# Altium PCB nrf5340_qkaa_config3.PcbDoc
Units mm, origin at the board's own origin, x right, y up, seen from the top; angles counter-clockwise.
Board outline 17 x 15 mm, 4 copper layers (Top Layer, Mid Layer 1, Mid Layer 2, Bottom Layer), stack 1.583 mm thick; 23 components, 63 nets, 192 pads, 114 vias.
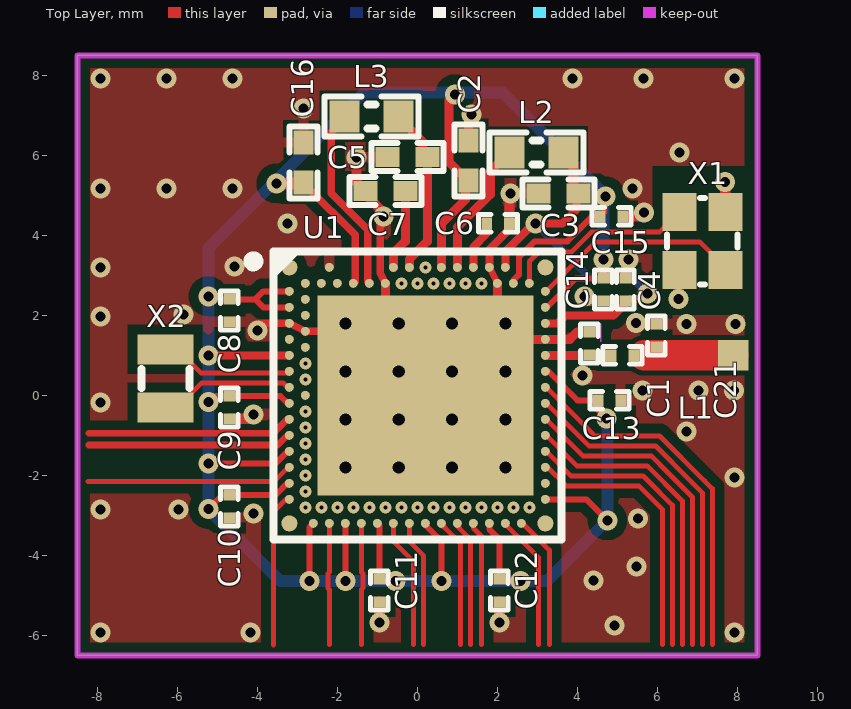
[diagram p0: Top Layer view]
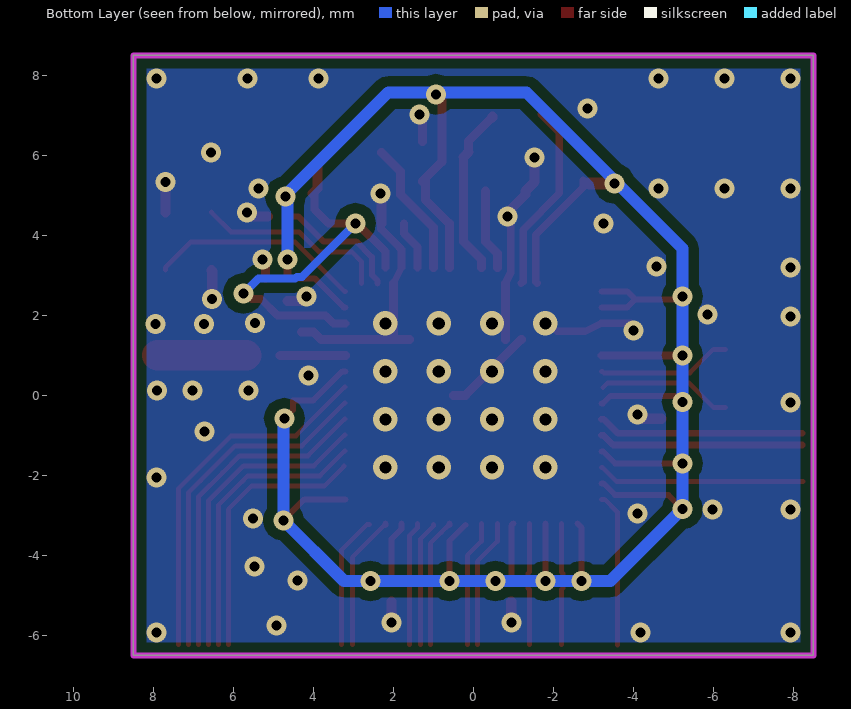
[diagram p1: Bottom Layer view, seen from below]
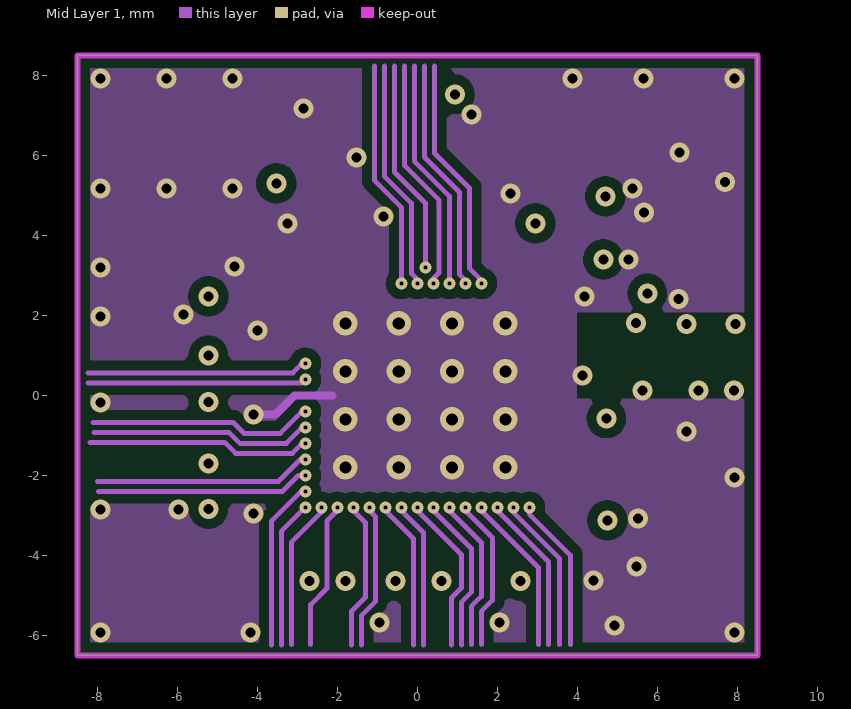
[diagram p2: Mid Layer 1]
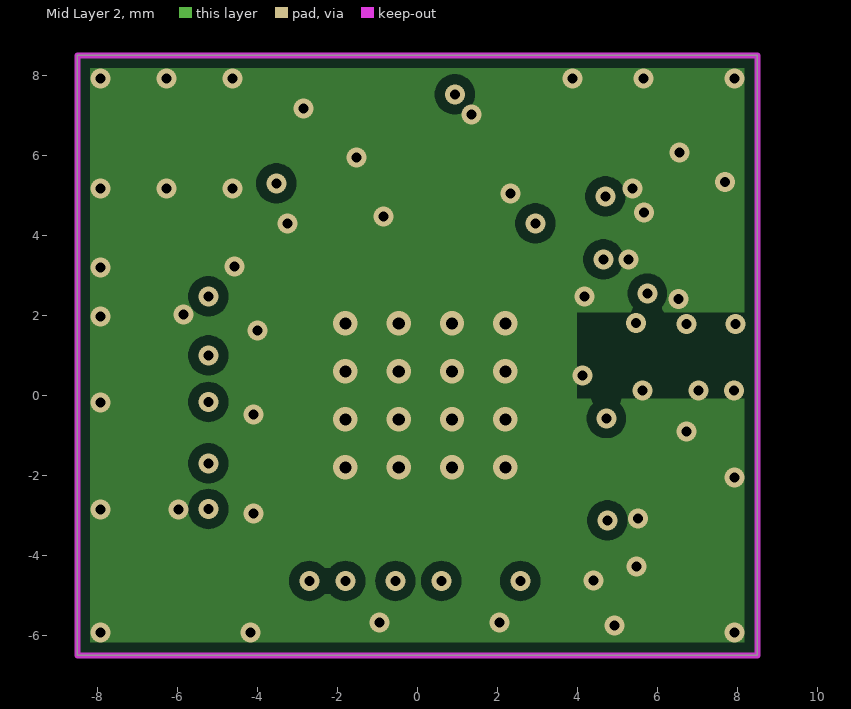
[diagram p3: Mid Layer 2]
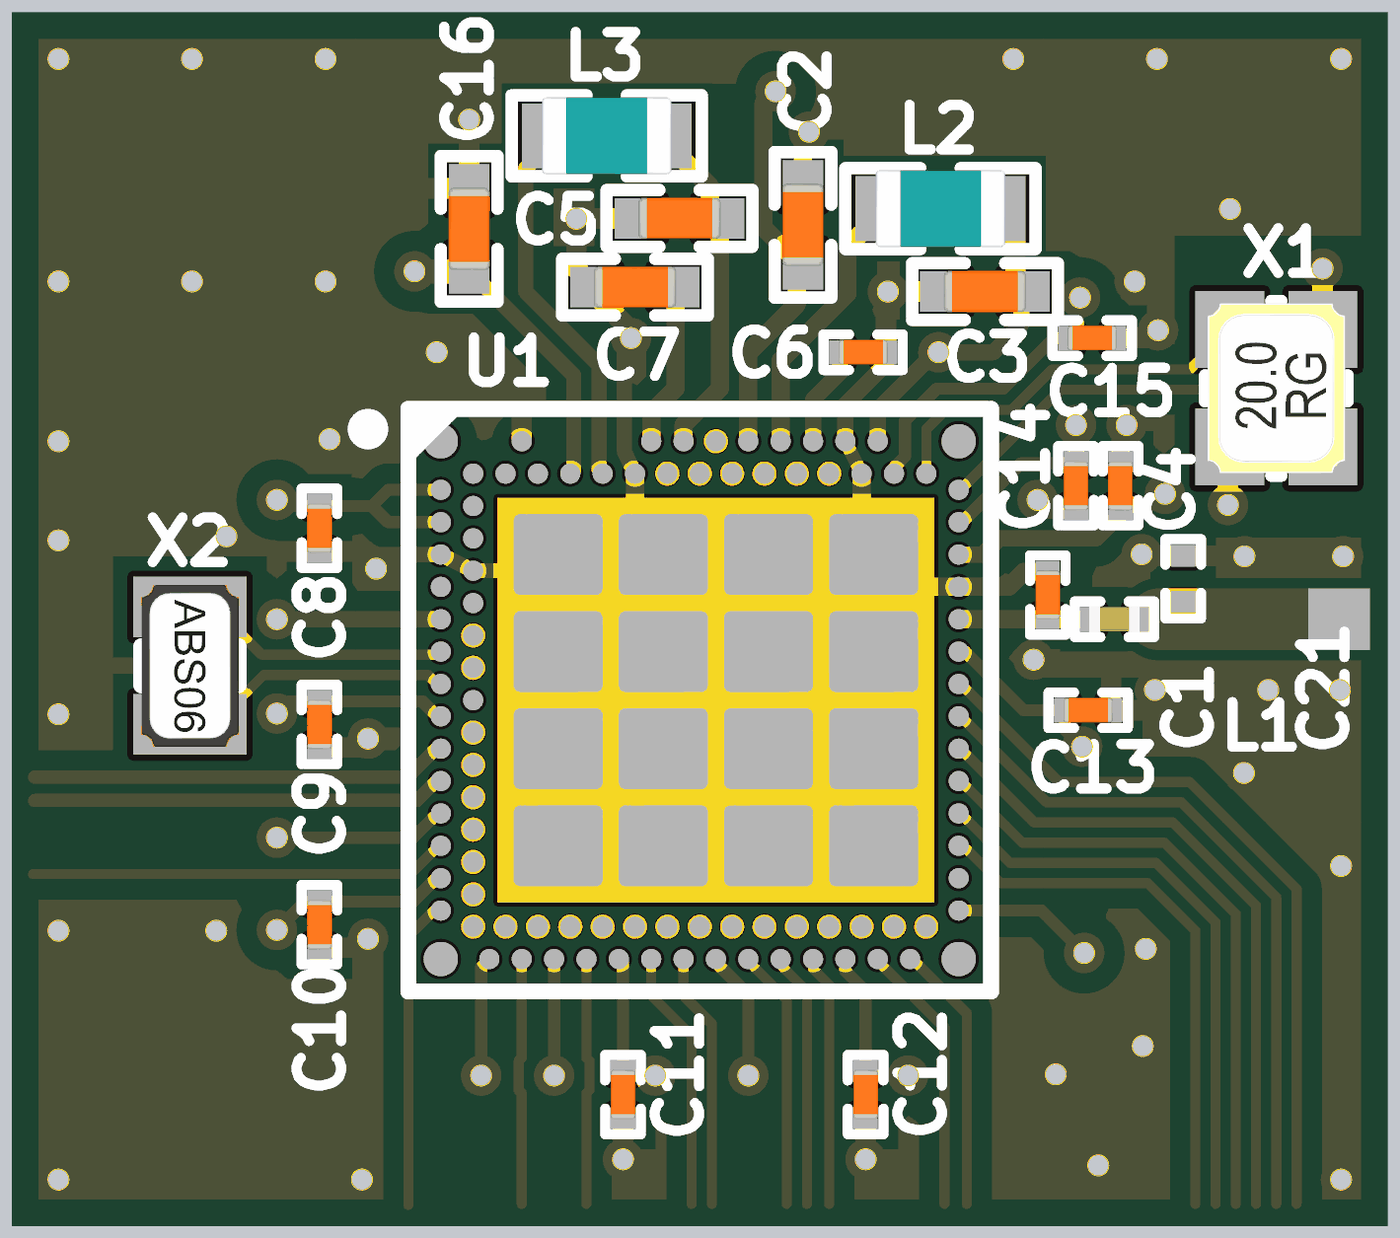
[diagram p4: 3D render of the assembled board from above, using the file's embedded part models]

## Layer stack, top to bottom
Top Solder: solder mask 0.0102, Solder Resist, Dk 3.5
Top Layer: signal copper 0.0356
Dielectric1: core 0.07, FR-4, Dk 4.8
Mid Layer 1: signal copper 0.036
Dielectric 3: prepreg 1.3, Dk 4.2
Mid Layer 2: signal copper 0.036
Dielectric 2: core 0.07, Dk 4.2
Bottom Layer: signal copper 0.0356
Bottom Solder: solder mask 0.0102, Solder Resist, Dk 3.5

## Board outline
-8.5,-6.5 8.5,-6.5 8.5,8.5 -8.5,8.5

## Design rules (kind name [scope] priority, off if disabled: settings)
Clearance Clearance_microvia [AsMM(ViaDiameter) = 0.3 vs AsMM(ViaDiameter) = 0.3] p1: gap=0.1 ignorepadtopadclearanceinfootprint=FALSE
Clearance Polygon_ANT [(InNamedPolygon('Top_Layer-GND')) or  (InNamedPolygon('Mid_Layer_1-GND')) or (InNamedPolygon('Mid_Layer_2-GND')) or (InNamedPolygon('Bottom_Layer-GND')) vs InNet('RF')] p2: gap=0.127 ignorepadtopadclearanceinfootprint=FALSE except(0: Arc-Hole Track-Hole SMDPad-Hole THPad-Hole Via-Hole Fill-Hole Poly-Hole Region-Hole Text-Hole)
Clearance Polygon [(InNamedPolygon('Top_Layer-GND')) or  (InNamedPolygon('Mid_Layer_1-GND')) or (InNamedPolygon('Mid_Layer_2-GND')) or (InNamedPolygon('Bottom_Layer-GND'))] p3: gap=0.25 ignorepadtopadclearanceinfootprint=FALSE
Clearance Clearance_Top [OnTopLayer] p4: gap=0.125 ignorepadtopadclearanceinfootprint=FALSE
Clearance [All] p5: gap=0.125 ignorepadtopadclearanceinfootprint=FALSE
ComponentClearance [All] p1 off: gap=0.254 collisioncheckmode=3 verticalgap=0.254 showdistances=FALSE
DiffPairsRouting [All] p1: maxlimit=0.193 minlimit=0.193 mostfreqgap=0.193 toplayer_minwidth=0.125 toplayer_maxwidth=0.381 toplayer_prefwidth=0.165 midlayer1_minwidth=0.125 midlayer1_maxwidth=0.381 midlayer1_prefwidth=0.165 midlayer2_minwidth=0.125 midlayer2_maxwidth=0.381 midlayer2_prefwidth=0.165 bottomlayer_minwidth=0.125 bottomlayer_maxwidth=0.381 bottomlayer_prefwidth=0.165 maxuncoupledlength=12.7
FabricationTestPointUsage TestPointUsage [All] p1: valid=0 allowmultiple=FALSE
FabricationTestpoint Testpoint [All] p1: side=3 testpointundercomponent=TRUE minsize=1.016 maxsize=2.54 preferedsize=1.524 minholesize=0 maxholesize=1.016 preferedholesize=0.813 testpointgrid=0.025 allowsidetop=TRUE allowsidebottom=TRUE usegrid=TRUE gridtolerance=0
Height [All] p1 off: minheight=0 maxheight=25.4 prefheight=12.7
HoleSize [All] p1: absolutevalues=TRUE maxlimit=4.064 minlimit=0.1 maxpercent=80.000 minpercent=20.000
MinimumAnnularRing [All] p1 off: minimumring=0.152
PolygonConnect PolygonConnect_1 [isVia and innet(gnd)] p1: connectstyle=Direct reliefconductorwidth=0.254 reliefentries=4 polygonreliefangle="90 Angle" airgapwidth=0.254
PolygonConnect [All] p2: connectstyle=Relief reliefconductorwidth=0.254 reliefentries=4 polygonreliefangle="90 Angle" airgapwidth=0.254
RoutingVias [All] p1: holewidth=0.305 width=0.61 viastyle="Through Hole" minholewidth=0.1 minwidth=0.3 maxholewidth=0.305 maxwidth=0.61
SilkToSolderMaskClearance SilkscreenOverComponentPads [IsPad] p1: minsilkscreentomaskgap=0.254 clearancetoexposedcopper=TRUE
SolderMaskExpansion SolderMaskExpansion_via [IsVia] p1: expansion=0.076 istentingtop=TRUE
SolderMaskExpansion [All] p2: expansion=0.076 istentingtop=FALSE
Width [All] p1: maxlimit=2 minlimit=0.125 preferedwidth=0.125 minimp=50.000000 maximp=50.000000 favimp=50.000000
23 further rules are at their usual default settings.

## Components (designator, comment, footprint, x,y, rotation, side; value= is the part's Value field where it differs from the comment)
C1 "0.7pF" CAPC0603X03L_C 4.3,1.3 r270 top
C2 "1.0µF" CAPC1005X04L 1.275,5.875 r90 top
C3 "1.0µF" CAPC1005X04L 3.525,5.05 r0 top
C4 "2.2nF" CAPC0603X03L_C 5.2,2.65 r90 top
C5 "1.0µF" CAPC1005X04L -0.25,5.955 r0 top
C6 "100nF" CAPC0603X03L_C 2.019,4.3 r0 top
C7 "1.0µF" CAPC1005X04L -0.8,5.105 r0 top
C8 "100nF" CAPC0603X03L_C -4.7,2.125 r270 top
C9 "100nF" CAPC0603X03L_C -4.7,-0.3 r270 top
C10 "100nF" CAPC0603X03L_C -4.7,-2.775 r270 top
C11 "100nF" CAPC0603X03L_C -0.948,-4.875 r270 top
C12 "100nF" CAPC0603X03L_C 2.05,-4.875 r270 top
C13 "100nF" CAPC0603X03L_C 4.8,-0.125 r0 top
C14 "100nF" CAPC0603X03L_C 4.65,2.65 r270 top
C15 "100nF" CAPC0603X03L_C 4.85,4.475 r0 top
C16 "1.0µF" CAPC1005X04L -2.85,5.825 r270 top
C21 "N.C." CAPC0603X03L_C_NC 5.975,1.5 r270 top
L1 "2.2nH" INDC0603X03L_C 5.125,1 r180 top
L2 "10µH" INDC1608X06L 2.975,6.075 r180 top
L3 "10µH" INDC1608X06L -1.15,6.975 r180 top
U1 "nRF5340-QKAA" AQFN40P700X700X85_HS-99N 0,0 r0 top locked
X1 "32MHz" BT-XTAL_2016 7.125,3.854 r90 top
X2 "32.768kHz" XTAL_2012 -6.3,0.425 r270 top

## Footprints (in the part's own frame and the unit in brackets; to place one, negate y for a bottom-side part, rotate by r counter-clockwise, add the part's x,y. Pads: shape width x height; smd on the part's side, far side on the other; paste and mask are expansions set on the pad)
AQFN40P700X700X85_HS-99N [mm] "AQFN, 98-Leads, Body 7.00x7.00mm, Pitch 0.40mm, Thermal Pad 5.4x5.0mm, IPC Medium Density"
  rect 5.4x5 smd paste-5 mask+0.05: 104(0.2,0)
  round 0.4 smd paste+0.012 mask+0.05: A1(-3.2,3.2) A31(3.2,3.2) AL1(-3.2,-3.2) AL31(3.2,-3.2)
  round 0.225 smd paste+0.012 mask+0.05: A5(-2.2,3.2) A13(-0.6,3.2) A15(-0.2,3.2) A17(0.2,3.2) A19(0.6,3.2) A21(1,3.2) A23(1.4,3.2) A25(1.8,3.2) A27(2.2,3.2) AA1(-3.2,-1) AA31(3.2,-1) AB2(-2.8,-1.2) AC1(-3.2,-1.4) AC31(3.2,-1.4) AD2(-2.8,-1.6) AE1(-3.2,-1.8) AE31(3.2,-1.8) AF2(-2.8,-2) AG1(-3.2,-2.2) AG31(3.2,-2.2) AH2(-2.8,-2.4) AJ1(-3.2,-2.6) AJ31(3.2,-2.6) AK2(-2.8,-2.8) AK4(-2.4,-2.8) AK6(-2,-2.8) AK8(-1.6,-2.8) AK10(-1.2,-2.8) AK12(-0.8,-2.8) AK14(-0.4,-2.8) AK16(0,-2.8) AK18(0.4,-2.8) AK20(0.8,-2.8) AK22(1.2,-2.8) AK24(1.6,-2.8) AK26(2,-2.8) AK28(2.4,-2.8) AK30(2.8,-2.8) AL3(-2.6,-3.2) AL5(-2.2,-3.2) AL7(-1.8,-3.2) AL9(-1.4,-3.2) AL11(-1,-3.2) AL13(-0.6,-3.2) AL15(-0.2,-3.2) AL17(0.2,-3.2) AL19(0.6,-3.2) AL21(1,-3.2) AL23(1.4,-3.2) AL25(1.8,-3.2) AL27(2.2,-3.2) AL29(2.6,-3.2) B2(-2.8,2.8) B4(-2.4,2.8) B6(-2,2.8) B8(-1.6,2.8) B10(-1.2,2.8) B12(-0.8,2.8) B14(-0.4,2.8) B16(0,2.8) B18(0.4,2.8) B20(0.8,2.8) B22(1.2,2.8) B24(1.6,2.8) B26(2,2.8) B28(2.4,2.8) B30(2.8,2.8) C1(-3.2,2.6) C31(3.2,2.6) D2(-2.8,2.4) E1(-3.2,2.2) E31(3.2,2.2) F2(-2.8,2) G1(-3.2,1.8) G31(3.2,1.8) H2(-2.8,1.6) J1(-3.2,1.4) J31(3.2,1.4) K2(-2.8,1.2) L1(-3.2,1) L31(3.2,1) M2(-2.8,0.8) N1(-3.2,0.6) N31(3.2,0.6) P2(-2.8,0.4) R1(-3.2,0.2) R31(3.2,0.2) T2(-2.8,0) U1(-3.2,-0.2) U31(3.2,-0.2) V2(-2.8,-0.4) W1(-3.2,-0.6) W31(3.2,-0.6) Y2(-2.8,-0.8)
  rrect15% 1.1x1 on Top Paste: ""(-1.75,-1.8) ""(-1.75,-0.6) ""(-1.75,0.6) ""(-1.75,1.8) ""(-0.45,-1.8) ""(-0.45,-0.6) ""(-0.45,0.6) ""(-0.45,1.8) ""(0.85,-1.8) ""(0.85,-0.6) ""(0.85,0.6) ""(0.85,1.8) ""(2.15,-1.8) ""(2.15,-0.6) ""(2.15,0.6) ""(2.15,1.8)
  silkscreen extent -4.22,-3.6 3.6,3.6, body extent -3.5,-3.5 3.5,3.5, height 0.85
BT-XTAL_2016 [mm] "Crystal 2.0 x 1.6 mm"
  rect 0.95x0.85 smd: 1(-0.725,-0.575) 2(0.725,-0.575) 3(0.725,0.575) 4(-0.725,0.575)
  silkscreen extent -1.08,-0.88 1.08,0.88, body extent -1.05,-0.85 1.05,0.85, height 0.56
CAPC0603X03L_C [mm] "Chip Capacitor, 2-Leads, Body 0.6x0.3mm, IPC High Density"
  rect 0.27x0.3 smd: 1(-0.285,0) 2(0.285,0)
  silkscreen extent -0.49,-0.22 0.49,0.22, body extent -0.3,-0.15 0.31,0.15, height 0.3
CAPC0603X03L_C_NC [mm] "Chip Capacitor, 2-Leads, Body 0.6x0.3mm, IPC High Density"
  rect 0.27x0.3 smd mask+0.05: 1(-0.285,0) 2(0.285,0)
  silkscreen extent -0.49,-0.22 0.49,0.22
CAPC1005X04L [mm] "Chip Capacitor, 2-Leads, Body 1.0x0.5mm, IPC High Density"
  rect 0.6x0.5 smd: 1(-0.5,0) 2(0.5,0)
  silkscreen extent -0.9,-0.35 0.9,0.35, body extent -0.51,-0.25 0.51,0.25, height 0.5
INDC0603X03L_C [mm] "Chip Inductor, 2-Leads, Body 0.6x0.3mm, IPC High Density"
  rect 0.27x0.3 smd: 1(-0.285,0) 2(0.285,0)
  silkscreen extent -0.49,-0.22 0.49,0.22, body extent -0.31,-0.16 0.31,0.16, height 0.26
INDC1608X06L [mm] "Chip Inductor, 2-Leads, Body 1.6x0.8mm, IPC High Density"
  rect 0.75x0.8 smd: 1(-0.675,0) 2(0.675,0)
  silkscreen extent -1.17,-0.5 1.17,0.5, body extent -0.8,-0.48 0.8,0.48, height 0.8
XTAL_2012 [mm] "XTAL SMD 2.0 x 1.2 mm"
  rect 0.75x1.4 smd: 1(-0.725,0) 2(0.725,0)
  silkscreen extent -0.24,-0.6 0.24,0.6, body extent -1,-0.61 1,0.61, height 0.6

## Part data
C1: library part C0201-0.7p, "Capacitor, NP0, ±0.05pF", Author=rsk, Component Class=Capacitors, Footprint Doc=0201, Pad Count=2
C2 C3 C5 C7 C16: library part C0402-1µ0-10V-X7S-GRM155C71A105KE11, "Capacitor, X7S, ±10%", Author=prbu, Component Class=Capacitors, Footprint Doc=0402, Pad Count=2
C4: library part C0201-2n2, "Capacitor, X7R, ±10%", Author=rsk, Component Class=Capacitors, Footprint Doc=0201, Pad Count=2
C6 C8 C9 C10 C11 C12 C13 C14 C15: library part C0201-100n-16V-X7S, "Capacitor, X7S, ±10%", Author=rsk, Component Class=Capacitors, Footprint Doc=0201, Pad Count=2
C21: library part C0201-N.C., "Not mounted", Assembly="Not mounted", Author=rsk, Component Class=Capacitors, Footprint Doc=0201, Pad Count=2
L1: library part L0201-2n2, "High frequency chip inductor, ±5%", Author=rsk, Component Class=Inductors, Footprint Doc=0201, Pad Count=2
L2 L3: library part L0603-10µ, "Chip Inductor, IDC,min = 50 mA, ±20%", Author=rsk, Component Class=Inductors, Footprint Doc=0603, Pad Count=2
U1: "Multi-protocol Bluetooth Low Energy, IEEE 802.15.4, ANT and 2.4GHz proprietary system-on-chip", Author=rsk, Component Class=nRF_Devices, Footprint Doc=AQFN-98, Pad Count=98
X1: library part XTAL_SMD2016_32MHz_8pF_General, "XTAL SMD 2016, 32MHz, Cl=8pF, Total Tol: ±30ppm", Author=rsk, Component Class=Oscillators, Footprint Doc=XTAL_2016, Pad Count=4
X2: library part XTAL_SMD2012_32.768kHz_9pF_General, "XTAL SMD 2012, 32.768kHz, Cl=9pF, Total Tol: ±50ppm", Author=rsk, Component Class=Oscillators, Footprint Doc=XTAL_2012, Pad Count=2

## Free pads (board coordinates)
  rect 0.762x0.762 smd mask+0.076: 0(7.9,1)
  round 0.3 on Mech16: 1(-2.8,-0.8) 1(-2.8,-2.8) 1(-2.8,-2.4) 1(-2.8,-2) 1(-2.8,-1.6) 1(-2.8,-1.2) 1(-2.8,-0.4) 1(-2.8,0.4) 1(-2.8,0.8) 1(-2.4,-2.8) 1(-2,-2.8) 1(-1.6,-2.8) 1(-1.2,-2.8) 1(-0.8,-2.8) 1(-0.4,-2.8) 1(-0.4,2.8) 1(0,-2.8) 1(0,2.8) 1(0.2,3.2) 1(0.4,2.8) 1(0.4,-2.8) 1(0.8,-2.8) 1(0.8,2.8) 1(1.2,-2.8) 1(1.2,2.8) 1(1.6,-2.8) 1(1.6,2.8) 1(2,-2.8) 1(2.4,-2.8) 1(2.8,-2.8)

## Via types
v1: diameter 0.5, hole 0.25, Top Layer to Bottom Layer, tented both sides, 68 vias
v2: diameter 0.3, hole 0.1, Top Layer to Mid Layer 1, tented top, 30 vias
v3: diameter 0.61, hole 0.305, Top Layer to Bottom Layer, tented both sides, 16 vias

## Nets (pads, with @x,y where several pads share a name; then routed paths per layer and width w, separated by ;. In a path a pad name is that pad's centre, name@x,y a point inside that pad or via, vN(x,y) a via of type N, cw(c..) or ccw(c..) an arc to the next point about the centre after c; other vN are vias at no path point)
ANT: C1.2 L1.2 U1.L31 | length 1.6
  Top Layer w0.225: U1.L31 L1.2
GND: C1.1 C2.2 C3.1 C4.2 C5.1 C6.2 C7.1 C8.2 C9.2 C10.2 C11.2 C12.2 C13.2 C14.2 C15.2 C16.1 C21.1 U1.104 U1.A5 U1.A25 U1.B12 U1.B26 U1.G1 U1.H2 U1.J31 X1.2 X1.4 | length 23.2
  Top Layer w0.165: U1.A25 U1.B26
  Top Layer w0.187: v1@-3.941,1.8 U1.G1 U1.H2 U1.104@-2.1,1.6 ; -0.931,3.07 U1.B12 ; -0.931,3.074 v1@-0.931,4.4
  Top Layer w0.2: U1.A25 1.8,3.65 1.875,3.725 1.875,3.727 2.304,4.156 C6.2
  Top Layer w0.225: U1.104@-1.2,1.4 U1.104 U1.104@0.495,0 ; U1.104@-0.8,1.4 U1.B12 ; C2.2@1.275,6.35 1.275,6.925 v1@1.35,7 ; U1.104@1.6,1.4 3.815,1.4 4,1.585 C1.1 ; U1.104@2,1.4 U1.B26 ; v1(4.175,2.475) v1@4.285,2.365 ; C4.2 5.2,3.325 v1(5.275,3.4) ; v1@5.65,4.475 5.664,4.489 v1(5.664,4.572)
  Top Layer w0.25: C7.1@-1.3,5.025 -0.875,4.6 v1@-0.875,4.45 ; C6.2@2.3,4.3 v1@2.3,5.05 ; v1@4.285,2.365 C14.2 ; C15.2 v1@5.65,4.475
  Top Layer w0.254: C9.2 -4.21,-0.585 v1(-4.1,-0.475) ; v1(-1.525,5.95) -1.525,5.33 C7.1 ; v1(-0.948,-5.675) C11.2 ; v1(2.05,-5.675) C12.2 ; v1@6.528,2.388 6.528,3.107 X1.4 ; v1(7.696,5.334) 7.696,4.583 X1.2
  Mid Layer 1 w0.2: v1(-4.1,-0.475) -3.55,-0.475 -3.075,0 -2.125,0
  other v1: -7.925,-5.925 -4.175,-5.925 7.925,-5.925 4.925,-5.75 4.4,-4.625 5.475,-4.275 5.512,-3.073 -4.1,-2.95 -7.925,-2.85 -5.975,-2.85 7.925,-2.05 6.725,-0.9 -7.925,-0.175 5.625,0.126 7.025,0.126 7.911,0.126 4.125,0.5 -4,1.625 6.731,1.778 7.95,1.778 5.461,1.803 -7.925,1.975 -5.85,2.025 6.528,2.413 -7.925,3.2 -4.575,3.225 -3.25,4.3 -0.85,4.475 2.325,5.05 -7.925,5.175 -6.275,5.175 -4.625,5.175 5.375,5.175 6.553,6.071 1.35,7.025 -2.85,7.175 -7.925,7.925 -6.275,7.925 -4.625,7.925 3.875,7.925 5.65,7.925 7.925,7.925
  other v3: -1.8,-1.8 -0.467,-1.8 0.867,-1.8 2.2,-1.8 -1.8,-0.6 -0.467,-0.6 0.867,-0.6 2.2,-0.6 -1.8,0.6 -0.467,0.6 0.867,0.6 2.2,0.6 -1.8,1.8 -0.467,1.8 0.867,1.8 2.2,1.8
NetC3_2: C3.2 C4.1 L2.1 U1.A27 U1.G31 | length 10.3
  Top Layer w0.2: U1.A27 2.2,3.593 2.907,4.3 3.625,4.3 3.975,4.65 C3.2@3.975,5.05 ; U1.G31 3.5,1.8 3.7,2 4.875,2 ; C3.2@4,5.05 C3.2@4.013,5.062 ; 4.9,2 5.315,2.415 5.54,2.415
  Top Layer w0.25: L2.1 3.65,6.05 3.9,5.8 3.9,5.175 4.013,5.062 C3.2
  Bottom Layer w0.2: v1(2.95,4.3) 4.286,2.964 4.414,2.964 4.453,2.925 5.375,2.925 v1(5.75,2.55)
NetC5_2: C5.2 L3.1 U1.A15 | length 4.3
  Top Layer w0.225: L3.1@-0.475,6.95 0.127,6.348 C5.2@0.127,6.078 ; U1.A15 -0.2,3.4 0.25,3.85 C5.2 C5.2@0.25,5.975
  Top Layer w0.25: L3.1@-0.475,6.95 L3.1 ; C5.2@0.127,6.078 C5.2
NetC6_1: C6.1 U1.A23 | length 1.2
  Top Layer w0.2: U1.A23 1.4,3.712 1.734,4.046 C6.1
NetC7_2: C7.2 U1.A13 | length 2
  Top Layer w0.225: U1.A13 -0.6,3.55 -0.3,3.85 C7.2
NetL2_2: L2.2 U1.A21 | length 3.4
  Top Layer w0.225: U1.A21 1,4.2 1.825,5.025 1.825,5.6 L2.2
NetL3_2: L3.2 U1.B10 | length 4.8
  Top Layer w0.187: L3.2@-1.7,7.025 -2.15,6.575 -2.15,5.049 -1.243,4.142 -1.243,2.843 U1.B10
P0.00/XL1: U1.N1 X2.1 | length 3.4
  Top Layer w0.125: X2.1 -6,1.15 -5.412,0.562 -3.262,0.562 -3.224,0.6 U1.N1
P0.01/XL2: U1.R1 X2.2 | length 3.4
  Top Layer w0.125: X2.2 -6,-0.3 -5.388,0.312 -3.359,0.312 U1.R1@-3.246,0.2
P0.02/NFC1: U1.W1 | length 5.2
  Top Layer w0.165: -8.217,-0.95 -3.613,-0.95 -3.263,-0.6 U1.W1
P0.03/NFC2: U1.AA1 | length 5.1
  Top Layer w0.165: -8.217,-1.24 -3.493,-1.24 -3.253,-1 U1.AA1
P0.04/AIN0: U1.V2 | length 5.7
  Mid Layer 1 w0.125: -8.113,-0.675 -4.61,-0.675 -4.335,-0.95 -3.427,-0.95 -2.877,-0.4 v2(-2.8,-0.4)
P0.05/AIN1: U1.Y2 | length 5.6
  Mid Layer 1 w0.125: -8.084,-0.925 -4.714,-0.925 -4.439,-1.2 -3.277,-1.2 -2.877,-0.8 v2(-2.8,-0.8)
P0.06/AIN2: U1.AB2 | length 5.6
  Mid Layer 1 w0.125: -8.188,-1.175 -4.818,-1.175 -4.543,-1.45 -3.127,-1.45 -2.877,-1.2 v2(-2.8,-1.2)
P0.07/AIN3: U1.AD2 | length 5.4
  Mid Layer 1 w0.125: -8,-2.15 -3.474,-2.15 -2.924,-1.6 v2(-2.8,-1.6)
P0.08/TRACEDATA3: U1.AH2 | length 4.2
  Mid Layer 1 w0.125: -3.65,-6.237 -3.65,-3.15 -2.9,-2.4 v2(-2.8,-2.4)
P0.09/TRACEDATA2: U1.AJ1 | length 3.9
  Top Layer w0.125: -3.6,-6.237 -3.6,-2.918 -3.282,-2.6 U1.AJ1
P0.10/TRACEDATA1: U1.AK2 | length 3.7
  Mid Layer 1 w0.125: -3.4,-6.237 -3.4,-3.4 v2(-2.8,-2.8)
P0.11/TRACEDATA0: U1.AK4 | length 3.7
  Mid Layer 1 w0.125: -3.15,-6.225 -3.15,-3.673 -2.4,-2.924 v2(-2.4,-2.8)
P0.12/TRACECLK: U1.AK6 | length 3.7
  Mid Layer 1 w0.125: -2.667,-6.225 -2.667,-5.232 -2.261,-4.826 -2.261,-3.138 -2,-2.877 v2(-2,-2.8)
P0.13/QSPI0: U1.AL5 | length 3.1
  Top Layer w0.125: -2.2,-6.225 -2.2,-4.859 -2.238,-4.821 -2.238,-4.459 -2.2,-4.421 U1.AL5
P0.14/QSPI1: U1.AK8 | length 3.7
  Mid Layer 1 w0.125: -1.65,-6.237 -1.65,-5.404 -1.3,-5.054 -1.3,-3.177 -1.538,-2.94 -1.538,-2.862 v2(-1.6,-2.8)
P0.15/QSPI2: U1.AK10 | length 3.6
  Mid Layer 1 w0.125: -1.4,-6.237 -1.4,-5.508 -1.05,-5.158 -1.05,-3.027 -1.138,-2.94 -1.138,-2.862 v2(-1.2,-2.8)
P0.16/QSPI3: U1.AL9 | length 3.1
  Top Layer w0.125: -1.4,-6.225 -1.4,-4.859 -1.362,-4.821 -1.362,-4.459 -1.4,-4.421 U1.AL9
P0.17/QSPI_CLK: U1.AK12 | length 3.7
  Mid Layer 1 w0.125: v2(-0.8,-2.8) -0.738,-2.862 -0.738,-2.94 -0.1,-3.577 -0.1,-6.237
P0.18/QSPI_CS: U1.AK14 | length 3.7
  Mid Layer 1 w0.125: v2(-0.4,-2.8) -0.338,-2.862 -0.338,-2.94 0.15,-3.427 0.15,-6.237
P0.19: U1.AL13 | length 3.2
  Top Layer w0.125: U1.AL13 -0.6,-3.65 -0.1,-4.15 -0.1,-6.225
P0.20: U1.AK16 | length 4
  Mid Layer 1 w0.125: v2(0,-2.8) 0.062,-2.862 0.062,-2.94 1.1,-3.977 1.1,-4.818 0.85,-5.068 0.85,-6.237
P0.21: U1.AL15 | length 3.2
  Top Layer w0.125: U1.AL15 -0.2,-3.65 0.15,-4 0.15,-6.225
P0.22: U1.AK18 | length 4
  Mid Layer 1 w0.125: v2@0.363,-2.837 v2(0.4,-2.8) 0.4,-2.877 1.35,-3.827 1.35,-4.921 1.1,-5.171 1.1,-6.237
P0.23: U1.AK20 | length 3.9
  Mid Layer 1 w0.125: v2(0.8,-2.8) 0.8,-2.877 1.6,-3.677 1.6,-5.025 1.35,-5.275 1.35,-6.225
P0.24: U1.AL27 | length 3.4
  Top Layer w0.125: U1.AL27@2.2,-3.224 3.025,-4.049 3.025,-6.225
  Top Layer w0.15: U1.AL27@2.2,-3.242 2.2,-3.224 U1.AL27
P0.25/AIN4: U1.AK28 | length 3.9
  Mid Layer 1 w0.125: v2(2.4,-2.8) 2.4,-2.924 3.55,-4.074 3.55,-6.234
P0.26/AIN5: U1.AL29 | length 3.3
  Top Layer w0.125: U1.AL29@2.6,-3.224 2.653,-3.224 3.3,-3.871 3.3,-6.225
P0.27/AIN6: U1.AK30 | length 3.9
  Mid Layer 1 w0.125: v2(2.8,-2.8) 2.8,-2.97 3.825,-3.995 3.825,-6.234
P0.28/AIN7: U1.AE31 | length 6.7
  Top Layer w0.125: U1.AE31@3.228,-1.772 3.719,-2.263 5.538,-2.263 6.125,-2.85 6.125,-6.225
P0.29: U1.U31 | length 8.6
  Top Layer w0.125: U1.U31@3.212,-0.188 4.287,-1.263 5.952,-1.263 6.825,-2.136 7.125,-2.436 7.125,-6.225
P0.30: U1.B24 | length 5.9
  Mid Layer 1 w0.125: 0.425,8.234 0.425,6.061 1.3,5.186 1.3,3.177 1.6,2.877 v2(1.6,2.8)
P0.31: U1.B22 | length 5.9
  Mid Layer 1 w0.125: 0.175,8.234 0.175,5.957 1.05,5.082 1.05,3.027 1.2,2.877 v2(1.2,2.8)
P1.00: U1.M2 | length 5.5
  Mid Layer 1 w0.125: -8.237,0.562 -3.115,0.562 -2.877,0.8 v2(-2.8,0.8)
P1.01: U1.P2 | length 5.5
  Mid Layer 1 w0.125: -8.237,0.312 -2.888,0.312 v2(-2.8,0.4)
P1.02/TWI: U1.AE1 | length 5.2
  Top Layer w0.125: -8.237,-2.15 -3.574,-2.15 -3.224,-1.8 U1.AE1
P1.03/TWI: U1.AF2 | length 5.3
  Mid Layer 1 w0.125: -7.975,-2.4 -3.37,-2.4 -2.97,-2 v2(-2.8,-2)
P1.04: U1.AL19 | length 3.5
  Top Layer w0.125: U1.AL19@0.6,-3.242 0.617,-3.242 0.801,-3.426 ; U1.AL19@0.6,-3.224 0.801,-3.425 ; 1.075,-6.225 1.075,-3.7 0.801,-3.426
  Top Layer w0.15: U1.AL19@0.6,-3.242 U1.AL19
P1.05: U1.AK22 | length 3.8
  Mid Layer 1 w0.125: v2(1.2,-2.8) 1.2,-2.877 1.875,-3.552 1.875,-5.125 1.6,-5.4 1.6,-6.225
P1.06: U1.AL21 | length 3.1
  Top Layer w0.125: U1.AL21@1,-3.224 1,-3.271 1.051,-3.321 ; 1.051,-3.322 1.325,-3.596 1.325,-6.225
P1.07: U1.AK24 | length 4
  Mid Layer 1 w0.125: v2(1.6,-2.8) 1.6,-2.877 3.025,-4.302 3.025,-6.234
P1.08: U1.AL23 | length 3.1
  Top Layer w0.125: U1.AL23 1.4,-3.317 1.6,-3.517 1.6,-6.225
P1.09: U1.AK26 | length 4
  Mid Layer 1 w0.125: v2(2,-2.8) 2,-2.877 3.275,-4.152 3.275,-6.234
P1.10: U1.R31 | length 9.1
  Top Layer w0.125: U1.R31@3.213,0.212 4.438,-1.013 6.055,-1.013 7.175,-2.132 7.375,-2.332 7.375,-6.225
P1.11: U1.B20 | length 5.8
  Mid Layer 1 w0.125: -0.075,8.234 -0.075,5.854 0.8,4.979 v2(0.8,2.8)
P1.12: U1.B18 | length 5.8
  Mid Layer 1 w0.125: -0.325,8.234 -0.325,5.75 0.538,4.887 0.538,3.06 0.4,2.923 v2(0.4,2.8)
P1.13: U1.A17 | length 5.4
  Mid Layer 1 w0.125: -0.575,8.234 -0.575,5.582 0.2,4.807 v2(0.2,3.2)
P1.14: U1.B16 | length 5.8
  Mid Layer 1 w0.125: -0.825,8.234 -0.825,5.479 -0.15,4.804 -0.15,3.05 0,2.9 v2(0,2.8)
P1.15: U1.B14 | length 5.7
  Mid Layer 1 w0.125: -1.075,8.234 -1.075,5.375 -0.4,4.7 v2@-0.4,2.825
  other v2: -0.4,2.8
R\E\S\E\T\: U1.AC31 | length 7.2
  Top Layer w0.125: U1.AC31@3.212,-1.388 3.837,-2.013 5.641,-2.013 5.764,-2.136 6.375,-2.746 6.375,-6.225
RF: C21.2 L1.1 pad.0 | length 2.2
  Top Layer w0.762: 5.675,1 pad.0
SWDCLK: U1.W31 | length 8.2
  Top Layer w0.125: U1.W31@3.212,-0.588 4.137,-1.513 5.848,-1.513 6.268,-1.932 6.875,-2.539 6.875,-6.225
SWDIO: U1.AA31 | length 7.7
  Top Layer w0.125: U1.AA31@3.212,-0.988 3.987,-1.763 5.745,-1.763 6.625,-2.643 6.625,-6.225
VDD_NRF: C2.1 C8.1 C9.1 C10.1 C11.1 C12.1 C13.1 C14.1 C15.1 C16.2 U1.A19 U1.AC1 U1.AG1 U1.AJ31 U1.AL3 U1.AL7 U1.AL11 U1.AL17 U1.AL25 U1.B8 U1.B28 U1.C1 U1.E1 U1.E31 U1.L1 U1.N31 U1.U1 | length 72.9
  Top Layer w0.15: v1(-5.225,-2.84) -4.875,-2.49 C10.1 -3.543,-2.49 -3.253,-2.2 U1.AG1 ; v1(-5.225,-1.7) -3.542,-1.7 -3.242,-1.4 U1.AC1 ; v1(-5.225,-0.165) -5.075,-0.015 C9.1 -3.427,-0.015 -3.242,-0.2 U1.U1 ; v1@-5.225,2.35 -5.175,2.4 -4.05,2.4 ; U1.E1 -3.85,2.2 -4.05,2.4 ; U1.C1 -3.85,2.6 -4.05,2.4 ; v1(-2.702,-4.64) -2.702,-3.302 U1.AL3 ; v1(-1.8,-4.64) U1.AL7 ; U1.AL11 -0.95,-3.25 -0.95,-3.514 ; C11.1@-0.948,-4.64 v1@-0.6,-4.64 ; C11.1 -0.948,-3.514 ; U1.AL17@0.2,-3.242 0.6,-3.642 v1(0.6,-4.64) ; U1.AL25 1.8,-3.346 2.05,-3.596 C12.1 2.1,-4.64 v1(2.575,-4.64) ; U1.B28 2.4,2.875 2.537,3.012 2.537,3.457 2.931,3.85 3.749,3.85 4.374,4.475 C15.1 4.675,4.585 v1@4.675,4.975 ; U1.AJ31 4.225,-2.6 v1(4.75,-3.125) ; U1.N31 3.277,0.6 4.002,-0.125 C13.1 4.515,-0.365 v1(4.725,-0.575) ; U1.E31 3.242,2.2 3.967,2.925 4.64,2.925 C14.1
  Top Layer w0.187: C16.2@-2.75,5.38 -2.75,5.208 -1.557,4.015 -1.557,2.843 U1.B8
  Top Layer w0.2: v1(-5.225,1) U1.L1
  Top Layer w0.203: C14.1 v1(4.65,3.4)
  Top Layer w0.225: U1.A19 0.6,4.295 1.2,4.895 C2.1@1.2,5.35 ; v1(0.938,7.525) 0.787,7.375 0.787,5.838 C2.1@1.275,5.35
  Top Layer w0.3: v1(-3.525,5.3) C16.2@-2.9,5.3
  Bottom Layer w0.3: v1(-5.225,2.475) -5.225,3.675 -1.325,7.575 2.125,7.575 4.65,5.05 v1(4.65,3.4) ; v1@-5.162,2.413 -5.225,2.35 v1(-5.225,1) v1(-5.225,-0.165) v1(-5.225,-1.7) v1(-5.225,-2.84) -3.425,-4.64 v1(-2.702,-4.64) v1(-1.8,-4.64) v1(-0.55,-4.64) v1(0.6,-4.64) v1(2.575,-4.64) 3.235,-4.64 v1(4.75,-3.125) 4.75,-0.6 v1(4.725,-0.575)
  other v1: 4.7,4.975
XC1: U1.C31 X1.1 | length 5.3
  Top Layer w0.125: U1.C31 3.224,2.6 4.462,3.838 7.059,3.838 7.7,3.197 X1.1
XC2: U1.B30 X1.3 | length 4.8
  Top Layer w0.125: U1.B30 2.8,3.348 3.039,3.588 3.858,3.588 4.358,4.088 6.058,4.088 X1.3
pads on no net: U1. U1.A1 U1.A31 U1.AG31 U1.AL1 U1.AL31 U1.B2 U1.B4 U1.B6 U1.D2 U1.F2 U1.J1 U1.K2 U1.T2

## Polygon pours and split planes (outlines as drawn)
GND on Mid Layer 2 "Mid_Layer_2-GND" (solid, remove dead copper, pour order 1002): -15,15 -15,-15 12.5,-15 12.5,15
GND on Mid Layer 1 "Mid_Layer_1-GND" (solid, remove dead copper, pour order 1004): -15,15 -15,-15 12.5,-15 12.5,15
GND on Bottom Layer "Bottom_Layer-GND" (solid, remove dead copper, pour order 1001): -15,15 -15,-15 12.5,-15 12.5,15
GND on Top Layer "Top_Layer-GND" (solid, remove dead copper, pour order 1000): -15.274,14.151 -15.275,-15.849 12.225,-15.849 12.226,14.151

## Keep-outs
Top Layer:
  rectangle: 4.575,1.35 4.6,1.775
Keep-Out Layer:
  the board outline again, w0.15

## Other copper
Top Layer:
  pour cut-out: 0.127,7.62 0.508,7.62 0.508,7.569 0.127,7.569
  pour cut-out: 5.867,5.74 5.867,2.007 8.179,2.007 8.179,5.74
Mid Layer 1:
  pour cut-out: 9.9,-0.083 3.982,-0.083 3.982,2.083 9.9,2.083
Mid Layer 2:
  pour cut-out: 9.9,-0.083 3.982,-0.083 3.982,2.083 9.9,2.083

## Silkscreen, mask and mechanical layers (free items; w line width, h text height)
Mechanical 1:
  the board outline again, w0.15

## Dimensions
8.5,-6.5 to -8.5,-6.5 on Mechanical 3
8.5,-6.5 to 8.5,8.5 on Mechanical 3